# EAGLE board master (EAGLE 6.4)

Size 160 x 100 mm. Coordinates in mm from the lower left corner, seen from the top.
Outline: 0,0 160,0 160,100 0,100 0,0
Copper layers (1*16): Top 0.035mm / dielectric 1.5mm / Bottom 0.035mm
Design rules "default": minimum track width 10mil, minimum drill 24mil, track to track 8mil, track to pad 8mil, pad to pad 8mil, via to via 8mil, smd to smd 8mil, copper to edge 40mil, drill to drill 8mil, minimum pad ring 10mil, minimum via ring 8mil, stop-mask expansion 4mil, vias tented up to drill 0mil, thermal gap 10mil

## Footprints (pad centres in the part's own frame; a part is rotated, then mirrored left to right if it is on the bottom)
C0805 = smd 1.3 x 1.5: 1 -0.95,0; 2 0.95,0
E2-5 = drill 0.813 pad 1.27: + -1.016,0 | drill 0.813 pad 1.27 octagon: - 1.016,0
SOD80C = smd 1.4 x 1.8: A 1.7,0; C -1.7,0
DO214AC = smd 1.8 x 1.7: A 2.05,0; C -2.05,0
TQFP32-08 = smd 1.27 x 0.559: 1 -4.293,2.8; 2 -4.293,2; 3 -4.293,1.2; 4 -4.293,0.4; 5 -4.293,-0.4; 6 -4.293,-1.2; 7 -4.293,-2; 8 -4.293,-2.8; 17 4.293,-2.8; 18 4.293,-2; 19 4.293,-1.2; 20 4.293,-0.4; 21 4.293,0.4; 22 4.293,1.2; 23 4.293,2; 24 4.293,2.8 | smd 0.559 x 1.27: 9 -2.8,-4.293; 10 -2,-4.293; 11 -1.2,-4.293; 12 -0.4,-4.293; 13 0.4,-4.293; 14 1.2,-4.293; 15 2,-4.293; 16 2.8,-4.293; 25 2.8,4.293; 26 2,4.293; 27 1.2,4.293; 28 0.4,4.293; 29 -0.4,4.293; 30 -1.2,4.293; 31 -2,4.293; 32 -2.8,4.293
TO252 = smd 1 x 1.6: 1 -2.28,-4.8; 2 2.28,-4.8 | smd 5.4 x 6.2: 3 0,2.5
AK500/2 = drill 1.321 long: 1 -2.515,0; 2 2.515,0
5-2,5 = smd 2.54 x 5.08: 1 0,0
HC49UP = smd 5.334 x 1.93: 1 -4.826,0; 2 4.826,0
SOT-23 = smd 0.762 x 0.762: 1 -0.979,-1.101; 2 0.94,-1.101; 3 0.025,1.067
R0805 = smd 1.3 x 1.5: 1 -0.95,0; 2 0.95,0
SMS-004 = smd 1.092 x 2.007: 1 -3.81,-4.496; 2 -1.27,-4.496; 3 1.27,-4.496; 4 3.81,-4.496; 5 3.81,4.496; 6 1.27,4.496; 7 -1.27,4.496; 8 -3.81,4.496
ML10 = drill 0.914 octagon: 1 -5.08,-1.27; 2 -5.08,1.27; 3 -2.54,-1.27; 4 -2.54,1.27; 5 0,-1.27; 6 0,1.27; 7 2.54,-1.27; 8 2.54,1.27; 9 5.08,-1.27; 10 5.08,1.27
ML6 = drill 0.914 octagon: 1 -2.54,-1.27; 2 -2.54,1.27; 3 0,-1.27; 4 0,1.27; 5 2.54,-1.27; 6 2.54,1.27
RFM69W-XXXS2 = smd 3 x 1.2: 1 -9.35,7; 2 -9.35,5; 3 -9.35,3; 4 -9.35,1; 5 -9.35,-1; 6 -9.35,-3; 7 -9.35,-5; 8 -9.35,-7; 9 9.35,-7; 10 9.35,-5; 11 9.35,-3; 12 9.35,-1; 13 9.35,1; 14 9.35,3; 15 9.35,5; 16 9.35,7
2X5-SHROUDED = drill 1.016 pad 1.88 octagon: 1 -1.27,5.08; 2 1.27,5.08; 3 -1.27,2.54; 4 1.27,2.54; 5 -1.27,0; 6 1.27,0; 7 -1.27,-2.54; 8 1.27,-2.54; 9 -1.27,-5.08; 10 1.27,-5.08

## Placement (x,y rotation side)
C1  100n  [C0805]  -46.99,54.61 0 top  (outside the outline)
C2  22uF  [E2-5]  -20.32,81.28 0 top  (outside the outline)
C8  100n  [C0805]  -66.04,54.61 0 top  (outside the outline)
C9  4.7uF  [E2-5]  -44.45,74.93 0 top  (outside the outline)
C10  33p  [C0805]  -15.24,68.58 0 top  (outside the outline)
C11  33p  [C0805]  -20.32,68.58 0 top  (outside the outline)
C12  100n  [C0805]  -16.51,62.23 0 top  (outside the outline)
C13  100n  [C0805]  -22.86,62.23 0 top  (outside the outline)
C14  4.7uF  [E2-5]  -55.88,74.93 0 top  (outside the outline)
C15  4.7uF  [E2-5]  -67.31,74.93 0 top  (outside the outline)
D1  3.3V  [SOD80C]  -55.88,68.58 0 top  (outside the outline)
D2  3.3V  [SOD80C]  -62.23,68.58 0 top  (outside the outline)
D3  3.3V  [SOD80C]  -68.58,68.58 0 top  (outside the outline)
D4  3.3V  [SOD80C]  -16.51,74.93 0 top  (outside the outline)
D6  [DO214AC]  30.48,40.64 180 top
IC1  MEGA8-AI  [TQFP32-08]  59.69,41.91 270 top
IC2  lm33  [TO252]  67.31,21.59 0 top
LED_RED  [AK500/2]  -88.9,-8.89 0 top  (outside the outline)
PAD1  WIREPADSMD5-2,5  [5-2,5]  36.83,6.35 0 top
Q1  [HC49UP]  46.99,52.07 0 top
Q3  [SOT-23]  -92.71,-26.67 0 top  (outside the outline)
Q4  [SOT-23]  -92.71,-30.48 0 top  (outside the outline)
R1  10k  [R0805]  -58.42,62.23 0 top  (outside the outline)
R2  [R0805]  -91.44,-35.56 0 top  (outside the outline)
R3  [R0805]  -91.44,-40.64 0 top  (outside the outline)
R7  10k  [R0805]  -68.58,62.23 0 top  (outside the outline)
R8  1k  [R0805]  82.55,62.23 0 top
R9  1k  [R0805]  83.82,58.42 0 top
R10  1k  [R0805]  -41.91,62.23 0 top  (outside the outline)
R11  1k  [R0805]  -53.34,62.23 0 top  (outside the outline)
S1  SWS004  [SMS-004]  62.23,58.42 90 top
SV1  [ML10]  93.98,24.13 90 top
SV2  [ML6]  -72.39,-11.43 0 top  (outside the outline)
U2  RFM69HW  [RFM69W-XXXS2]  20.32,15.24 0 top
U$1  AVR_SPI_PROG2PTH2  [2X5-SHROUDED]  92.71,55.88 0 top
USART  [AK500/2]  -77.47,0 0 top  (outside the outline)

## Library data of the parts
C1 C2 C8-C15 R1-R3 R7-R11 = rcl
D1-D4 D6 = diode
IC1 = atmel; MPN: ATMEGA8-16AU; OC_FARNELL: 9171371; OC_NEWARK: 73M8863
IC2 = linear
LED_RED USART = con-ptr500; OC_FARNELL: unknown; OC_NEWARK: unknown
PAD1 = wirepad
Q1 = crystal; OC_FARNELL: unknown; OC_NEWARK: unknown
Q3 Q4 = transistors
S1 = smd-special
SV1 SV2 = con-harting-ml; OC_FARNELL: unknown; OC_NEWARK: unknown
U2 = SparkFun-RF
U$1 = SparkFun

## Nets
+3V3: C1.1 C2.+ C8.1 C9.+ C13.1 C15.+ D6.A IC1.4 IC1.6 IC1.18 IC2.2 R1.1 R2.2 R3.2 R7.1 U2.8
GND: C1.2 C2.- C8.2 C9.- C10.1 C11.1 C12.2 C13.2 C14.- C15.- D1.A D2.A D3.A D4.A IC1.3 IC1.5 IC1.21 IC2.3 LED_RED.1 SV1.8 SV1.9 SV1.10 SV2.6 U2.9 U2.11 U$1.4 U$1.6 U$1.8 U$1.10
LED1: IC1.24 SV1.1
LED2: IC1.25 SV1.2
LED3: IC1.26 SV1.3
LED4: IC1.27 SV1.4
LED5: IC1.28 SV1.5
LED_FALSTART: IC1.19 SV1.6
LED_FALSTART_GATE: Q4.1
LED_GO: Q3.2 SV1.7
LED_GO_GATE: IC1.23 Q3.1
LED_RED: IC1.2 LED_RED.2
LED_S1: IC1.9 SV2.1
LED_S2: IC1.10 SV2.2
LED_S3: IC1.11 SV2.3
LED_S4: IC1.12 SV2.4
LED_S5: IC1.13 SV2.5
MISO: IC1.16 S1.8 U2.13
MOSI: IC1.15 S1.5 U2.14
N$1: Q3.3 R2.1
N$2: Q4.3 R3.1
N$7: R7.2 U2.1
N$8: D4.C R8.1 S1.4
N$9: PAD1.1 U2.10
N$10: D3.C R9.1 S1.3
N$11: D2.C R10.1 S1.2
N$12: D1.C R11.1 S1.1
N$13: R8.2 U$1.1
N$14: R11.2 U$1.9
N$15: R10.2 U$1.7
N$16: R9.2 U$1.5
N$17: C11.2 IC1.7 Q1.2
N$18: C10.2 IC1.8 Q1.1
RESET: IC1.29 R1.2 S1.6
RXD: IC1.30 USART.1
SCK: IC1.17 S1.7 U2.12
SS: IC1.14 U2.15
TXD: IC1.31 USART.2
VCC: C12.1 C14.+ D6.C IC2.1

## Tracks (layer width: path | path; a pad name or v marks a point on that pad's centre or on a via)
+3V3  (15 unrouted)
GND  (28 unrouted)
LED1  (1 unrouted)
LED2  (1 unrouted)
LED3  (1 unrouted)
LED4  (1 unrouted)
LED5  (1 unrouted)
LED_FALSTART  (1 unrouted)
LED_GO  (1 unrouted)
LED_GO_GATE  (1 unrouted)
LED_RED  (1 unrouted)
LED_S1  (1 unrouted)
LED_S2  (1 unrouted)
LED_S3  (1 unrouted)
LED_S4  (1 unrouted)
LED_S5  (1 unrouted)
MISO  (2 unrouted)
MOSI  (2 unrouted)
N$1  (1 unrouted)
N$2  (1 unrouted)
N$7  (1 unrouted)
N$8  (2 unrouted)
N$9  (1 unrouted)
N$10  (2 unrouted)
N$11  (2 unrouted)
N$12  (2 unrouted)
N$13  (1 unrouted)
N$14  (1 unrouted)
N$15  (1 unrouted)
N$16  (1 unrouted)
N$17  (2 unrouted)
N$18  (2 unrouted)
RESET  (2 unrouted)
RXD  (1 unrouted)
SCK  (2 unrouted)
SS  (1 unrouted)
TXD  (1 unrouted)
VCC  (3 unrouted)